# Altium PCB TAG_V2.PcbDoc (part 2 of 2)
Units mm, origin at the board's own origin, x right, y up, seen from the top; angles counter-clockwise.
Board outline 19.13 x 23 mm, 6 copper layers (L1, L2, L3, L4, L5, L6), stack 0.922 mm thick; 120 components, 81 nets, 435 pads, 552 vias.
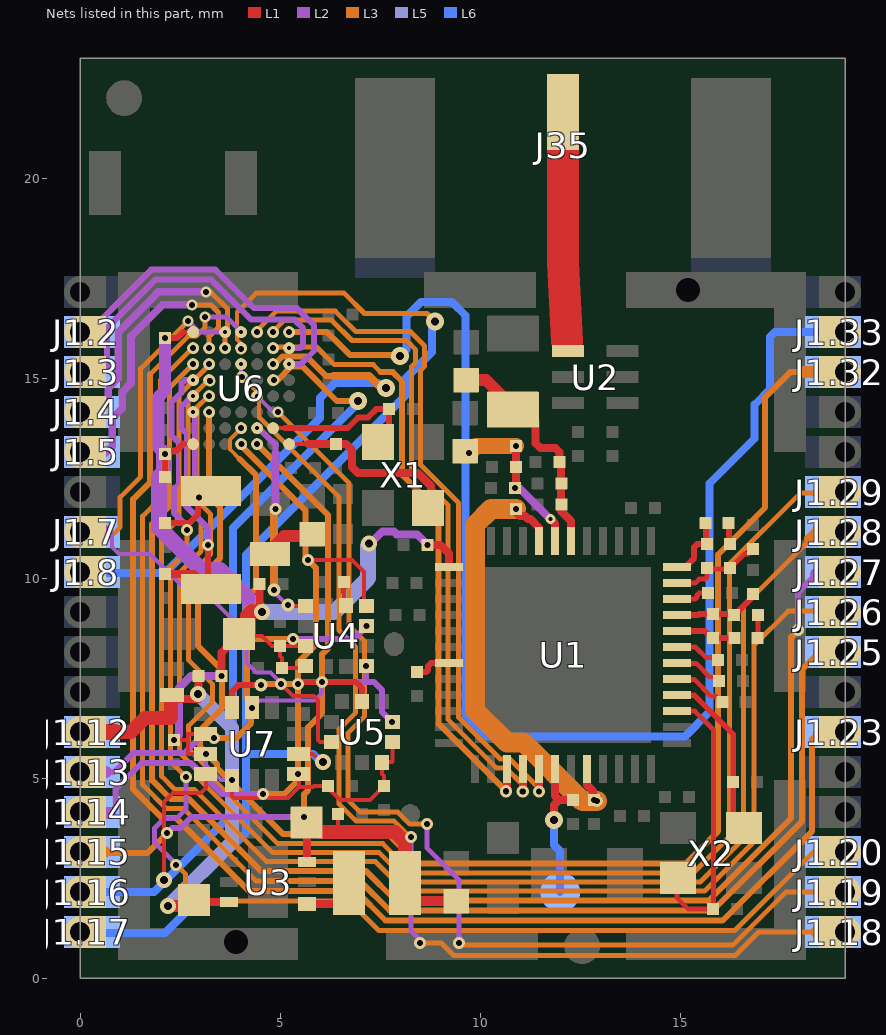
[diagram p6: the nets of this part, all layers, seen from the top]

## Via types
v1: diameter 0.3, hole 0.15, L1 to L2, tented top, 223 vias
v2: diameter 0.45, hole 0.2, L1 to L6, tented both sides, 106 vias
v3: diameter 0.3, hole 0.15, L2 to L3, 65 vias
v4: diameter 0.3, hole 0.15, L4 to L6, tented bottom, 51 vias
v5: diameter 0.23, hole 0.1, L1 to L2, tented top, 40 vias
v6: diameter 0.275, hole 0.15, L2 to L3, 29 vias
v7: diameter 0.3, hole 0.15, L1 to L2, 11 vias
v8: diameter 0.4, hole 0.2, L1 to L6, tented both sides, 9 vias
v9: diameter 0.3, hole 0.15, L1 to L3, tented top, 4 vias
v10: diameter 0.3, hole 0.1, L1 to L2, 3 vias
v11: diameter 0.52, hole 0.27, L1 to L6, tented bottom, 3 vias
v12: diameter 0.25, hole 0.1, L1 to L2, tented top, 2 vias
v13: diameter 0.32, hole 0.15, L1 to L2, tented both sides, 1 vias
v14: diameter 0.32, hole 0.15, L1 to L2, tented top, 1 vias
v15: diameter 0.3, hole 0.15, L2 to L3, tented both sides, 1 vias
v16: diameter 0.4, hole 0.2, L1 to L6, tented top, 1 vias
v17: diameter 0.32, hole 0.15, L2 to L3, tented both sides, 1 vias
v18: diameter 0.3, hole 0.15, L2 to L3, tented top, 1 vias

## Nets (pads, with @x,y where several pads share a name; then routed paths per layer and width w, separated by ;. In a path a pad name is that pad's centre, name@x,y a point inside that pad or via, vN(x,y) a via of type N, cw(c..) or ccw(c..) an arc to the next point about the centre after c; other vN are vias at no path point) (continued)
I2C_SCL: J1.15.0 U4.1 U5.2 U6.A3 U7.13 | length 21.4
  L2 w0.1: v1(4.3,6.75) 4.488,6.938 5.863,6.938 6.05,7.125 v18(6.05,7.4)
  L2 w0.15: v3(2.175,3.625) 2.3,3.75 2.505,3.75 2.78,4.025 v3(5.6,4.025) ; v18(6.05,7.4) 7.15,7.4 ; v1(7.15,7.8) 7.15,7.4 ; v1(7.8,6.4) 7.55,6.65 7.55,7.2 7.35,7.4 7.15,7.4
  L2 w0.3: J1.15.0@-0.025,3.1 J1.15.0@0.025,3.15
  L3 w0.15: 0.65,3.125 1.675,3.125 v3(2.175,3.625) ; v6(4.424,13.35) 6.2,11.574 6.2,8.25 6.05,8.1 v18(6.05,7.4) 6.05,6.625 5.7,6.275 5.7,4.7 5.6,4.6 v3(5.6,4.025)
  L3 w0.3: J1.15.0@-0.05,3.075 J1.15.0@0,3.075 ; J1.15.0@0,3.15 0.625,3.15
  other v5: 4.425,13.35
I2C_SDA: J1.14.0 U4.4 U5.4 U6.A4 U7.14 | length 22.7
  L1 w0.1: v1(5.7,10.45) 6.8,10.45 7.1,10.15 U4.4@7.1,9.3
  L1 w0.15: U7.14@3.8,6.763 3.8,7.175 3.95,7.325 v14(4.525,7.325) ; v3(5.45,7.35) 5.45,7.4 6.9,7.4 7.05,7.25 U5.4@7.05,6.913
  L2 w0.15: 0.75,4.125 0.88,4.255 0.88,4.72 1.535,5.375 2.775,5.375 3.5,4.65 ; 3.45,4.7 3.5,4.65 ; v3(4.575,4.6) 3.55,4.6 3.5,4.65
  L2 w0.3: J1.14.0@0.025,4.15 0.05,4.125 0.75,4.125
  L3 w0.15: v6(4.039,13.352) 4.039,13.292 5.632,11.7 5.632,10.518 v1(5.7,10.45) 5.9,10.25 5.9,8.35 5.45,7.9 v3(5.45,7.35) ; v3@4.525,7.275 4.6,7.35 v3(5.45,7.35) ; v3(4.575,4.6) 5.1,4.6 5.45,4.95 v3(5.45,7.35)
  other v1: 5.45,7.35
  other v3: 4.525,7.325 5.7,10.45
  other v5: 4.025,13.35
IRQ1: J1.16.0 U6.E2 U7.4 | length 22.2
  L1 w0.1: v8(2.1,2.45) 2.1,4.4 2.325,4.625 3.025,4.625 3.15,4.75 U7.4@3.15,5.025 ; U7.4@3.15,5.1 U7.4@3.15,5.025 ; U7.4@3.175,5.05 U7.4@3.15,5.025
  L3 w0.15: v5(4.825,14.95) v6(4.85,14.951) ; v5(4.825,14.95) v6(4.85,14.951) 4.939,14.951 5.281,15.293 5.554,15.293 6.421,14.426 v2(6.95,14.426)
  L6 w0.2: J1.16.0@0,2.15 J1.16.0@0.3,2.15 1.85,2.15 3.825,4.125 3.825,11.251 v2@6.851,14.277
IRQ2: J1.17.0 U6.G4 U7.9 | length 29.3
  L1 w0.1: U7.9@5.475,5.6 5.821,5.6 v8@6.038,5.384
  L3 w0.1: 3.95,16.675 3.925,16.65 3.925,15.961 4.024,15.861 v6(4.024,15.725)
  L3 w0.125: 3.95,16.675 4.4,17.125 6.6,17.125 7.112,16.613 8.67,16.613 v2(8.867,16.417)
  L3 w0.3: J1.17.0@0,1.15 J1.17.0@0.025,1.125
  L6 w0.2: J1.17.0@0,1.125 2.125,1.125 2.85,1.85 2.85,2.35 3.1,2.6 ; 3.112,2.587 4.15,3.625 4.15,10.575 8.125,14.55 8.125,14.975 8.8,15.65 8.8,16.351 v2(8.867,16.417) ; 4.15,5.6 5.821,5.6 v8@6.038,5.384
  other v5: 4.025,15.75
  other v8: 6.075,5.4
IRQ_DRDY: J1.7.0 U5.7 U6.H5 | length 17.6
  L1 w0.1: v1@5.05,7.35 5.05,7.326 5.263,7.113 5.326,7.05 5.85,7.05 5.95,6.95 5.95,5.95 6,5.9 U5.7@6.288,5.9
  L2 w0.1: 0.75,11.1 0.8,11.05 0.8,10.776 0.976,10.6 1.75,10.6 2.9,9.45 3.325,9.45 4.162,8.612 4.162,7.888 4.415,7.635 4.765,7.635 v1@5.05,7.35
  L2 w0.125: v6@2.7,16.425 2.975,16.15 v5(3.625,16.15)
  L2 w0.2: 0.5,11.15 0.65,11.15 0.7,11.1 0.75,11.1
  L2 w0.5: J1.7.0@0,11.2 0.05,11.15 0.5,11.15
  L3 w0.125: 0.65,11.125 0.85,11.125 1,11.275 1,12.025 1.512,12.537 1.512,15.238 v6(2.7,16.426)
  L3 w0.3: J1.7.0@0,11.125 0.65,11.125
  other v1: 5.025,7.35
IRQ_MAG: U4.7 U6.B3 | length 5.2
  L1 w0.1: v13@5.2,9.3 U4.7@5.6,9.3
  L2 w0.1: v17(4.85,9.7) 4.85,9.65 5.184,9.316 5.191,9.316 v13(5.2,9.325)
  L2 w0.15: v5(4.425,13.75) 4.466,13.75 4.881,13.334 4.881,13.125
  L2 w0.2: v3(4.881,11.725) 4.881,13.125
  L3 w0.2: v17(4.85,9.7) v3@4.85,11.75
MAG_CS: J1.13.0 U4.3 U6.B4 | length 15.8
  L2 w0.15: 0.65,5.15 0.85,5.15 1.1,5.4 1.325,5.625 2.6,5.625 2.975,6 v3(3.35,6) ; v3(5.325,8.475) 6.837,8.475 v7(7.163,8.8) ; v7@7.169,8.794 v7@7.175,8.8
  L2 w0.3: J1.13.0@0,5.15 0.65,5.15
  L3 w0.1: 3.984,12.984 3.746,13.222 3.745,13.464 4.025,13.744 v5(4.025,13.75)
  L3 w0.15: v3(3.35,6) 3.9,6 4.275,6.375 4.275,6.885 4.175,6.985 4.175,8.45 4.2,8.475 v3(5.325,8.475) ; 3.984,12.984 4.4,12.568 4.4,9.75 4.175,9.525 4.175,8.5
  other v6: 4.024,13.75
NetC3_2: C3.2 U6.D7 X3.2 | length 6.8
  L1 w0.15: X3.2@3.15,9.8 3.2,9.85 v1(3.2,10.825) ; X3.2@3.425,10.025 3.825,10.025 3.82,10.02 X3.2@3.82,9.92
  L1 w0.2: C3.2@2.125,10.1 2.85,10.1 X3.2@3.15,9.8
  L2 w0.1: 2.637,13.663 2.65,13.65 2.65,11.95
  L2 w0.15: 2.625,11.95 2.625,11.825 3.2,11.25 v1(3.2,10.825) ; 2.625,13.65 2.535,13.74 2.535,14.291 v5@2.794,14.55
  other v5: 2.825,14.55
NetC6_2: C6.2 U6.C7 X3.1 | length 3.8
  L1 w0.15: C6.2@2.125,11.375 2.725,11.375 2.95,11.6 2.95,11.9 X3.1@3.225,12.175
  L2 w0.15: v5(2.825,14.15) 2.875,14.1 2.875,12.3 2.875,12.115 v1(2.97,12.02)
NetC7_1: C7.1 U1.7 | length 1.1
  L1 w0.125: U1.7@14.925,8.275 15.385,8.275 15.65,8.01 C7.1@15.875,8.01
NetC8_1: C8.1 U1.6 | length 1.2
  L1 w0.125: U1.6@14.94,7.87 15.4,7.87 15.745,7.525 15.875,7.525 C8.1@15.975,7.425
NetC9_1: C9.1 U1.31 | length 1
  L1 w0.15: C9.1@8.425,7.65 8.65,7.65 8.7,7.7 8.7,7.8 8.775,7.875 U1.31@9.225,7.875
NetC10_1: C10.1 U1.10 | length 0.9
  L1 w0.12: U1.10@14.925,9.475 15.075,9.475 15.375,9.475 15.425,9.525 15.425,9.575 15.475,9.625 C10.1@15.7,9.625
NetC11_1: C11.1 C12.1 C15.2 U1.9 | length 2.2
  L1 w0.15: U1.9@14.925,9.075 15.45,9.075 15.475,9.1 C12.1@15.825,9.1 16.3,9.1 16.325,9.1 C11.1@16.35,9.075 16.825,9.55 C15.2@16.825,9.6
NetC11_2: C11.2 R2.1 | length 0.5
  L1 w0.125: R2.1@16.935,8.5 16.95,8.515 C11.2@16.95,9
NetC12_2: C12.2 R2.2 U1.8 | length 1.6
  L1 w0.15: U1.8@14.925,8.675 15.625,8.675 C12.2@15.85,8.45 ; C12.2@15.85,8.5 R2.2@16.315,8.5 ; R2.2@16.315,8.45 R2.2@16.365,8.5
NetC13_1: C13.1 R3.2 | length 0.5
  L1 w0.15: R3.2@16.21,11.375 16.225,11.36 C13.1@16.225,10.85
NetC13_2: C13.2 C16.2 C19.2 U1.11 | length 2.4
  L1 w0.125: U1.11@14.925,9.875 15.375,9.875 15.475,9.975 15.625,9.975 15.675,10.025 C19.2@15.675,10.225 ; C19.2@15.675,10.25 C19.2@15.675,10.225 ; C16.2@16.825,10.725 16.7,10.6 16.6,10.6 C13.2@16.25,10.25 16.225,10.225 C19.2@15.675,10.225
NetC19_1: C19.1 R3.1 U1.12 | length 1.6
  L1 w0.15: U1.12@14.925,10.275 15.125,10.275 15.35,10.5 15.35,10.775 15.425,10.85 C19.1@15.65,10.85 ; R3.1@15.65,11.35 C19.1@15.65,10.85 ; C19.1@15.675,10.85 C19.1@15.65,10.85
NetC22_2: C22.2 U1.3 X2.1 | length 6.9
  L1 w0.125: X2.1@14.925,2.475 14.925,2 15.2,1.725 C22.2@15.825,1.725 15.837,1.737 C22.2@15.837,1.775 ; U1.3@15.1,6.675 15.367,6.675 15.837,6.204 C22.2@15.837,1.775 ; C22.2@15.825,1.775 C22.2@15.837,1.775
NetC26_2: C26.2 C27.2 C28.2 C29.2 L2.2 U1.18 | length 5.2
  L1 w0.2: C26.2@11.39,13.91 11.39,13.37 11.51,13.25 11.88,13.25 11.98,13.15 C27.2@11.98,12.9 ; C27.2@12.025,12.9 12.025,12.375 12.025,11.675 12.275,11.425 U1.18@12.275,10.925
  L1 w0.3: L2.2@9.65,14.95 10.15,14.95 C26.2@10.875,14.225 ; C26.2@10.835,14.075 C26.2@10.835,14.225
NetC30_2: C30.2 C31.2 C32.2 L3.1 U1.19 | length 4.1
  L1 w0.2: v1(10.875,12.25) 10.9,12.275 C31.2@10.9,12.775 v3(10.9,13.3) ; v12(11.765,11.475) 11.875,11.365 U1.19@11.875,10.925
  L2 w0.2: v1(10.875,12.25) 10.98,12.25 11.755,11.475 v12(11.765,11.475)
  L3 w0.3: 9.875,13.275 9.9,13.3
  L3 w0.4: v1(9.725,13.125) 9.875,13.275 ; 9.9,13.3 v3(10.9,13.3)
  other v1: 10.9,13.3
  other v3: 9.725,13.125
NetC34_2: C34.2 C58.2 L4.2 L5.1 U3.3 | length 5.8
  L1 w0.1: 6.45,3.7 C58.2@6.45,4.15
  L1 w0.2: C34.2@5.65,3.7 5.675,3.675 U3.3@5.675,2.9
  L1 w0.25: L4.2@8.2,2.025 8.3,1.925 L5.1@9.4,1.925
  L1 w0.35: C34.2@6,3.65 7.875,3.65 8.125,3.4 L4.2@8.125,2.375
NetC38_2: C38.2 U1.4 X2.3 | length 4.3
  L1 w0.14: U1.4@14.925,7.075 15.35,7.075 16.325,6.1 16.325,5.4 ; X2.3@16.325,3.935 C38.2@16.325,4.9 16.325,5.5
  L1 w0.3: X2.3@16.325,3.935 X2.3@16.52,3.74
NetC57_2: C57.2 U4.5 | length 0.6
  L1 w0.1: U4.5@6.6,9.3 C57.2@6.6,9.875
NetL4_1: L4.1 U3.1 | length 0.8
  L1 w0.2: U3.1@5.675,1.85 L4.1@6.5,1.85
NetL7_1: L7.1 L8.2 | length 1.2
  L1 w0.3: L8.2@4.7,10.65 5.1,11.05 L7.1@5.7,11.05
NetR1_1: R1.1 U1.5 | length 1.3
  L1 w0.125: U1.5@14.93,7.47 15.35,7.47 15.77,7.05 15.9,7.05 15.975,6.975 R1.1@16,6.975
NFC1: J1.5.0 U6.G6 | length 7.3
  L2 w0.19: J1.5.0@0,13.15 0.025,13.125 0.625,13.125 0.8,13.3 0.8,14 1.05,14.25 1.05,14.65 1.271,14.871 1.271,16.054 1.291,16.054 2.067,16.83 v6@2.72,16.83
  L3 w0.125: v6@2.825,16.825 3,16.825 3.274,16.826 3.462,16.638 3.462,16.275 3.224,16.037 v6(3.224,15.75) ; v6@2.825,16.85 v6@2.833,16.842
  other v5: 3.225,15.75
  other v6: 2.799,16.825
NFC2: J1.4.0 U6.G5 | length 6.8
  L2 w0.19: J1.4.0@0.025,14.15 0.425,14.15 0.7,14.425 0.7,14.75 0.953,15.003 0.953,16.147 1.763,16.956 1.763,16.963 1.957,17.157 v6@3.068,17.157
  L3 w0.125: v6@3.175,17.15 3.268,17.15 3.687,16.731 3.687,16.15 3.624,16.087 v6(3.624,15.75)
  other v5: 3.625,15.75
  other v6: 3.15,17.151
P0.02: J1.32.0 U6.C6 | length 37.4
  L3 w0.15: v6(3.224,14.15) 3.224,12.051 3.5,11.775 3.5,10.499 2.95,9.949 2.95,8.3 3.55,7.701 3.55,6.75 3,6.2 3,5.771 3.425,5.346 3.425,5.25 5.075,3.6 7.703,3.6 8.438,2.865 15.14,2.865 15.95,3.675 15.95,10.59 17.125,11.765 17.125,14.525 17.75,15.15 18.125,15.15
  L3 w0.3: 18.125,15.15 J1.32.0@19.125,15.15 J1.32.0@19.15,15.15
  other v5: 3.225,14.15
P0.03: J1.29.0 U6.D6 | length 35.5
  L3 w0.125: v5(3.225,14.55) 3.2,14.55 2.924,14.274 2.924,14.025 2.925,14.024 2.925,11.937 3.263,11.6 3.263,10.597 2.713,10.047 2.713,7.95 3.312,7.35 3.313,6.913 2.713,6.313 2.713,5.722 3.188,5.248 3.188,5.112 4.937,3.363 7.569,3.363 8.304,2.627 15.327,2.627 16.228,3.528 16.228,10.353 18,12.125 18.4,12.125
  L3 w0.3: 18.475,12.125 19.05,12.125 J1.29.0@19.1,12.175
  other v6: 3.224,14.55
P0.04: J1.28.0 U6.E6 | length 35.1
  L3 w0.125: v6(3.248,14.925) 3.224,14.925 3.2,14.95 2.699,14.449 2.699,13.025 2.7,11.725 3.025,11.4 3.025,10.678 2.488,10.14 2.488,5.629 2.963,5.154 2.963,4.987 4.812,3.137 7.476,3.137 8.211,2.402 15.5,2.402 16.588,3.49 16.588,6.076 16.59,6.079 16.59,8.912 16.578,8.925 ; 16.588,8.925 16.588,9.312 18.25,10.975
  L3 w0.3: 18.25,10.975 18.425,11.15 J1.28.0@19.125,11.15 J1.28.0@19.175,11.15
  other v5: 3.225,14.95
P0.05: J1.20.0 U6.E7 | length 32.1
  L2 w0.1: 2.35,12.25 2.45,12.35 2.45,13.425 2.437,13.437
  L2 w0.125: v3(2.4,2.825) 2.4,2.85 1.863,3.387 1.863,3.755 2.095,3.988 2.407,3.988 2.65,4.231 v15(2.65,5.025)
  L2 w0.15: 2.35,12.25 2.35,11.625 2.675,11.3 v3(2.675,11.2) ; 2.425,13.425 2.285,13.565 2.285,14.395 2.535,14.645 2.535,14.86 2.625,14.95 v5(2.825,14.95)
  L3 w0.125: v3(2.4,2.825) 2.413,2.825 2.637,2.6 2.637,2.363 3.07,1.93 6.73,1.93 7.472,1.188 16.358,1.188 16.55,1.38 ; v15(2.65,5.025) 2.263,5.412 2.263,10.275 2.675,10.687 v3(2.675,11.2) ; 16.552,1.378 18.3,3.125 18.45,3.125
  L3 w0.3: 18.45,3.125 J1.20.0@19.125,3.125
P0.06: J1.27.0 U6.F7 | length 36
  L2 w0.15: v3(17.95,8.7) 17.95,9.65 18.4,10.1
  L2 w0.3: 18.4,10.1 19.075,10.1 J1.27.0@19.1,10.125
  L3 w0.125: 1.8,11.35 2.236,11.786 2.236,14.762 v6(2.824,15.35)
  L3 w0.15: 1.8,11.35 1.8,4.947 2.272,4.475 2.725,4.475 3.279,3.921 4.525,2.675 7.15,2.675 7.885,1.94 15.711,1.94 17.775,4.004 17.775,8.525 v3(17.95,8.7)
  other v5: 2.825,15.35
P0.07: J1.26.0 U6.F6 | length 34.8
  L3 w0.125: v6@3.224,15.325 2.948,15.05 2.474,14.575 2.474,11.486 2.038,11.05 2.038,5.045 2.37,4.712 2.863,4.712 4.663,2.912 7.383,2.912 8.118,2.177 15.613,2.177 16.852,3.417 16.852,8.327 17.7,9.175 18.375,9.175
  L3 w0.15: 18.375,9.175 18.475,9.175
  L3 w0.3: 18.475,9.175 19.1,9.175 J1.26.0@19.125,9.15
  other v5: 3.225,15.35
  other v6: 3.224,15.35
P0.08: J1.25.0 U6.G7 | length 35.2
  L3 w0.125: v6(2.824,15.75) 2.8,15.75 2.05,15 2.05,14.986 2.011,14.947 2.011,11.999 1.563,11.55 1.563,4.834 2.159,4.237 2.588,4.237 4.4,2.425 4.65,2.425
  L3 w0.15: 4.65,2.425 7.004,2.425 7.739,1.69 15.815,1.69 18.05,3.925 18.05,7.725 18.475,8.15
  L3 w0.3: 18.475,8.15 J1.25.0@19.1,8.15
  other v5: 2.825,15.75
P0.11: J1.18.0 U6.F4 | length 28.2
  L2 w0.1: v5(4.025,15.35) 4.025,15.051 v3(4.05,15.026)
  L2 w0.125: v3(8.275,3.525) 8.275,1.175 8.5,0.95 v3(8.5,0.875)
  L3 w0.1: v3(4.05,15.026) 4.05,15.018 4.472,14.597 4.472,14
  L3 w0.125: 4.5,14 6.475,12.025 6.475,8.692 6.888,8.279 6.888,6.638 6.475,6.225 6.475,4.35 6.9,3.925 7.85,3.925 v3@8.275,3.5 ; v3(8.5,0.875) 9.033,0.875 9.346,0.562 16.374,0.562 16.961,1.15 18.4,1.15
  L3 w0.3: 18.4,1.15 J1.18.0@19.125,1.15
P0.15: J1.23.0 U6.H4 | length 36.1
  L2 w0.125: v6@3.1,16.525 3.664,16.525 4.025,16.164 v5(4.025,16.15)
  L3 w0.125: 1.75,15.1 2.7,16.05 2.9,16.05 3.125,16.275 v6(3.125,16.526)
  L3 w0.15: 1.325,4.725 2.05,4 2.4,4 4.225,2.175 6.9,2.175 7.635,1.44 16.065,1.44 18.3,3.675 18.3,5.975 18.425,6.1 ; 1.327,4.727 1.325,4.728 1.325,11.014 1.325,11.975 1.75,12.4 1.75,15.1
  L3 w0.3: 18.475,6.1 J1.23.0@19.1,6.1
P0.21: J1.33.0 U6.H1 | length 34.4
  L3 w0.15: v6(5.225,16.15) 6.175,16.15 6.75,15.575 7.776,15.575 7.825,15.526 7.975,15.526 v2(8,15.551)
  L6 w0.2: v2(8,15.551) 8.163,15.713 8.163,16.538 8.525,16.9 9.3,16.9 9.64,16.56 9.64,6.49 10.09,6.04 15.12,6.04 15.73,6.65 15.73,12.36 16.865,13.495 16.865,14.335 17.25,14.72 17.25,16.03 17.37,16.15 J1.33.0@18.825,16.15 J1.33.0@19.125,16.15
  other v5: 5.225,16.15
P0.22: J1.8.0 U6.F2 | length 12.9
  L3 w0.15: v6(4.826,15.349) 4.865,15.349 5.059,15.543 5.657,15.543 6.15,15.05 6.33,15.05
  L3 w0.2: 6.33,15.05 7.227,15.05 v2@7.451,14.826
  L6 w0.2: J1.8.0@0.05,10.125 2.125,10.125 6,14 6,14.5 6.375,14.875 7.45,14.875 7.475,14.85 7.563,14.85 7.65,14.762 v2(7.65,14.751)
  other v5: 4.825,15.35
P0.26: J1.19.0 U6.D3 | length 27.1
  L2 w0.1: v5(4.425,14.55) 4.825,14.15 v6(4.95,14.15)
  L2 w0.125: v3(8.675,3.85) 8.675,3.25 8.875,3.05 9.475,2.45 v3(9.475,0.875)
  L3 w0.125: v6(4.95,14.15) 6.725,12.375 6.725,8.813 7.113,8.425 7.113,6.544 6.7,6.132 6.7,4.45 7,4.15 7.943,4.15 8.243,3.85 v3(8.675,3.85) ; v3(9.475,0.875) 9.528,0.822 16.315,0.822 17.643,2.15 18.475,2.15
  L3 w0.3: 18.475,2.15 J1.19.0@18.975,2.15
SPI1_CLK: U1.41 U6.H3 | length 17.9
  L1 w0.2: v1@11.475,4.685 U1.41@11.475,5.225
  L3 w0.125: v6@4.35,16.15 v6@4.4,16.15 ; v5(4.425,16.15) 4.425,16.199 4.901,16.675 6.379,16.675 6.891,16.163 8.254,16.163 8.613,15.804 8.613,15.297 8.513,15.197 8.513,12.83 9.46,11.883 9.46,6.519 10.497,5.482 10.736,5.482 11.47,4.748 v1(11.47,4.67)
  other v3: 11.47,4.67
  other v6: 4.425,16.15
SPI1_MISO: U1.40 U6.H2 | length 17
  L1 w0.2: v1@11.07,4.68 11.075,4.685 U1.40@11.075,5.225
  L2 w0.2: v3(11.06,4.66) v3@11.1,4.7
  L3 w0.125: v6(4.825,16.15) 4.825,16.174 5.101,16.45 6.286,16.45 6.798,15.938 8.161,15.938 8.388,15.711 8.388,15.39 8.288,15.29 8.288,12.737 9.2,11.825 9.2,6.461 10.404,5.257 10.643,5.257 11.06,4.84 v3(11.06,4.66) ; v3@11.05,4.625 v3@11.05,4.66
  other v1: 11.07,4.66
  other v5: 4.825,16.15
SPI1_MOSI: U1.39 U6.G2 | length 15.4
  L1 w0.2: v1@10.675,4.725 U1.39@10.675,5.225
  L3 w0.125: v6(4.824,15.75) 4.855,15.78 5.907,15.78 6.35,15.338 7.329,15.338 7.516,15.151
  L3 w0.15: 7.516,15.151 7.816,15.151 8.05,14.916 8.05,12.58 8.963,11.667 8.963,6.362 v3(10.65,4.675)
  other v1: 10.65,4.67
  other v5: 4.825,15.75
SWDCLK: J1.2.0 U6.F1 | length 8.5
  L2 w0.15: J1.2.0@-0.025,16.15 J1.2.0@0,16.15 0.215,16.15 1.778,17.713 3.383,17.713 4.347,16.75 5.42,16.75 5.847,16.324 5.847,15.678 5.519,15.35 v5(5.225,15.35)
SWDIO: J1.3.0 U6.G1 | length 8.4
  L2 w0.15: J1.3.0@0,15.15 0.525,15.15 0.675,15.3 0.675,16.25 0.85,16.425 0.85,16.432 1.882,17.463 3.28,17.463 4.28,16.462 5.354,16.462 5.575,16.242 5.575,15.825 5.5,15.75 v5(5.225,15.75)
UWB_ANT: J35.1 U2.1 | length 6.2
  L1 w0.8: J35.1@12.075,22.1 12.075,17.875 12.175,15.926
VCC: C37.2 D2.K J1.12.0 R10.1 U3.6 | length 11.7
  L1 w0.1: 2.275,6.9 D2.K@2.35,6.975
  L1 w0.2: D2.K@2.35,6.975 2.965,6.975 R10.1@2.965,7.55 ; C37.2@2.85,1.9 U3.6@3.725,1.9
  L1 w0.3: v8(2.2,1.8) 2.8,1.8 C37.2@2.85,1.85
  L1 w0.35: 0.875,6.15 1.25,6.15 ; 1.275,6.15 1.625,6.5 2.275,6.5 2.275,6.9
  L1 w0.4: J1.12.0@0.3,6.15 0.875,6.15
  L5 w0.35: v8(2.2,1.8) 3.8,3.4 3.8,6.25 v8(2.95,7.1)
VCC_DEV: C14.2 C33.2 C36.2 C39.2 C41.2 C43.2 C45.2 C46.2 C54.2 C55.2 R10.2 R11.2 U1.25 U4.9 U4.10 U5.1 U5.10 U6.A7 U6.H7 U7.2 U7.3 U7.5 U7.8 | length 33.6
  L1 w0.1: v7(2.35,5.95) 2.7,5.95 ; 2.575,13.35 U6.A7@2.825,13.35 ; 2.575,16.15 U6.H7@2.825,16.15 ; v1(3.15,5.6) 2.7,5.6 2.7,6.1 U7.2@3.15,6.1 ; U7.5@3.8,4.9 3.8,4.55 3.85,4.5 5.2,4.5 5.475,4.775 ; C36.2@4.2,8.55 4.549,8.55 4.799,8.3 C41.2@5,8.3 ; C43.2@5.026,7.75 C43.2@5.05,7.75 ; C41.2@5.05,8.25 C41.2@5,8.3 ; U7.8@5.475,5.1 5.475,4.775 ; U4.9@5.6,8.3 C41.2@5,8.3 ; U4.10@5.65,7.85 5.55,7.75 C43.2@5.05,7.75 ; U5.10@7.55,5.35 7.55,5.1 7.6,5.05 C33.2@7.6,4.8 7.25,4.45 6.5,4.45 6.2,4.75 C39.2@6.2,4.8 5.85,4.8 5.825,4.775 5.475,4.775 ; U5.10@7.55,5.4 7.8,5.4 7.813,5.413 U5.1@7.813,5.9 ; C41.2@5,8.3 5,8.05 5.05,8 C43.2@5.05,7.75
  L1 w0.15: v1(2.125,16) 2.425,16 2.575,16.15
  L1 w0.18: C46.2@2.125,12.525 v1(2.125,13.1) ; C55.2@2.205,13.175 2.4,13.175 2.575,13.35
  L1 w0.2: v7(3.535,7.55) 3.535,8.135 C36.2@3.7,8.3 ; v8@4.415,9.185 v8@4.5,9.1 ; v8@4.49,9.185 R11.2@4.49,9.85 ; v8@7.215,10.86 v8(7.222,10.86) ; v1(8.69,10.83) 9.005,10.83 9.225,10.61 U1.25@9.225,10.275
  L1 w0.4: C36.2@4.2,8.55 4.2,9.05 4.3,9.15
  L2 w0.1: v1(3.15,5.6) 3.15,5.318 3.518,4.95 v1(3.8,4.95)
  L2 w0.2: v7(2.35,5.95) 2.475,6.075 2.475,7.25 2.775,7.55 v7(3.535,7.55) ; v8(7.222,10.86) 7.25,10.86 7.555,11.165 7.845,11.165 7.915,11.095 8.425,11.095 v1(8.69,10.83)
  L2 w0.3: v1(2.125,13.1) 2.1,13.125 1.96,13.265 1.96,14.53 2.125,14.694 v1(2.125,16)
  L2 w0.4: v1@2.1,13.125 2.1,12.655 1.975,12.53 1.975,11.264 3.039,10.2 3.5,10.2 v8(4.55,9.15)
  L5 w0.4: v8(4.55,9.15) 6.35,9.15 7.2,10 v8@7.2,10.8
  other v1: 5.45,5.1
VDDDIG: C1.2 C24.2 U1.20 U1.44 | length 12
  L1 w0.2: v3(10.9,11.725) 10.9,11.65 C24.2@10.925,11.625 ; C24.2@10.925,11.775 C24.2@10.925,11.625 ; U1.20@11.475,10.94 11.475,11.258 11.258,11.475 11.2,11.475 11.125,11.55 11,11.55 C24.2@10.925,11.625 ; U1.44@12.675,5.225 12.675,4.825 12.825,4.675 C1.2@12.825,4.425
  L3 w0.5: v3(10.9,11.725) 10.267,11.725 9.872,11.33 9.872,6.69 10.666,5.896 11.084,5.896 12.555,4.425 v3(12.925,4.425)
  other v1: 12.85,4.45 10.9,11.725
VDDIO: C2.2 T1.1 U1.42 | length 3.6
  L1 w0.2: v2(11.85,3.95) 11.85,4.325 11.975,4.45 ; U1.42@11.875,5.225 11.875,4.55 11.975,4.45 ; C2.2@12.325,4.45 11.975,4.45
  L6 w0.2: v2(11.85,3.95) 11.85,3.325 12,3.175 T1.1@12,2.15
XC1: C49.2 U6.B2 X1.3 | length 3.8
  L1 w0.1: U6.B2@4.825,13.75 5.125,13.75
  L1 w0.15: 5.125,13.75 6.684,13.75 6.95,14.016 7.191,14.016 7.4,14.225 C49.2@7.725,14.225 ; X1.3@7.35,13.587 X1.3@7.456,13.481 ; X1.3@7.725,13.525 C49.2@7.725,14.113
XC2: C48.2 U6.A1 X1.1 | length 4.8
  L1 w0.1: U6.A1@5.225,13.35 5.7,13.35
  L1 w0.2: 5.7,13.35 C48.2@6.4,13.35 6.65,13.35 6.8,13.2 6.8,12.775 6.95,12.625 8.45,12.625 8.775,12.3 X1.1@8.775,11.725
pads on no net: A2.2 F1.A1 F2.A1 U1.1 U1.2 U1.13 U1.14 U1.29 U1.34 U1.Paste1 U1.Paste2 U1.Paste3 U1.Paste4 U1.Paste5 U1.Paste6 U1.Paste7 U1.Paste8 U1.Paste9 U2.6 U3.Paste1 U3.Paste2 U3.Paste3 U3.Paste4 U4.2 U4.11 U4.12 U6.C3 U7.10 U7.11

## Polygon pours and split planes (outlines as drawn)
GND on L2 "L2_GND" (solid, remove dead copper, pour order 9): 0.425,17.65 18.7,17.65 18.7,0.45 0.425,0.45
GND on L5 "L5-GND" (solid, remove dead copper, pour order 10): 0.926,0.475 18.15,0.475 18.15,17.65 0.954,17.65
GND on L6 "L6-GND" (solid, remove dead copper, pour order 12): 1.6,0.45 17.525,0.45 17.525,17.65 1.6,17.65
GND on L3 "L3-GND" (solid, remove dead copper, pour order 13): 0.9,17.65 18.2,17.65 18.2,0.45 0.9,0.45
GND on L4 "L4-GND" (solid, remove dead copper, pour order 11): 0.65,17.65 18.475,17.65 18.475,0.725 18.475,0.45 0.65,0.45
GND on L1 "PWR/SIG1-No Net 1" (solid, pour order 8): 18.5,22.6 18.5,17.6 6.3,17.6 6.3,22.6
GND on L1 "L1_GND" (hatched 90Degree grid 0.1 track 0.1, remove dead copper, pour order 14): 0.891,17.603 18.215,17.603 18.215,0.508 0.944,0.508

## Other copper
L1:
  rectangle net GND: 18.4,17.4 18.5,18
  rectangle net GND: 13.3,17.4 18.4,18.15
  rectangle net GND: 6.3,17.425 11.35,18.075
  rectangle net NetC34_2: 8.525,1.575 9.725,2.225
  rectangle net NetC34_2: 6.05,3.775 6.6,4.275
  rectangle net GND: 13.15,21.4 18.4,22.6
  rectangle net GND: 6.3,21.3 11.4,22.5
  rectangle net GND: 6.28,16.93 7.31,17.65
  rectangle net GND: 17.025,5.25 17.9,6.725
  rectangle net GND: 7.075,17.425 8.075,17.65
  rectangle net GND: 1.575,14.75 1.85,16.75
  rectangle net GND: 0.95,11.25 1.75,13.15
  rectangle net GND: 5.45,0.425 7.675,1.25
  rectangle net GND: 17.35,4.95 18.15,6.8
  rectangle net GND: 13.225,16.975 14,17.65
  rectangle net GND: 11.05,16.75 11.38,17.65
  rectangle net GND: 17.025,6.725 17.75,7.95
  rectangle net GND: 0.95,10.95 1.75,11.25
  rectangle net GND: 7.075,16.75 8.55,17.425
  rectangle net GND: 8.075,16.75 8.75,17.65
  rectangle net GND: 14.4,16.475 16,17.3
  region net GND: 4.55,3.25 4.55,3.85 3.175,3.85 3.175,3.25
  rectangle net GND: 0.925,6.9 1.75,7.3
  rectangle net GND: 11.125,17.55 11.4,18.05
  pour cut-out: 14.5,11.5 cw(c14.5,11.52) 14.48,11.52 14.48,11.95 14.63,11.95 14.63,11.5
  region net VCC: 3.95,1.55 3.95,2.175 3.419,2.175 3.225,2.35 3.025,2.35 3.025,1.55
  region net NetL4_1: 5.45,1.575 5.45,2.175 6.004,2.175 6.325,2.725 7.125,2.725 7.125,1.575
  region net GND: 3.25,3.05 3.325,3.125 4.05,3.125 4.05,2.675 3.5,2.675 3.5,2.275 5.9,2.275 5.9,2.65 4.9,2.65 4.5,3.05 4.5,3.425 2.95,3.425 2.975,3.4 2.975,3.05
  region net NetC34_2: 5.45,3.025 5.275,3.5 5.275,3.8 6.6,3.825 7.925,3.825 8.525,3.425 8.525,3.175 7.725,3.175 7.6,3.3 7.6,3.325 6.2,3.325 5.9,3.025
  pour cut-out: 4.2,1.5 5.2,1.5 5.2,1.25 4.2,1.25
  region net BALUN_RF_P: 13.155,14.305 13.155,13.505 13.955,13.505 13.955,14.305
  region net BALUN_RF_N: 11.795,14.305 11.795,13.505 12.595,13.505 12.595,14.305
  pour cut-out: 12.68,14.885 12.68,14.5 13.11,14.5 13.11,14.885
  pour cut-out: 14.202,14.765 14.207,13.184 13.486,13.189 13.634,14.765
  pour cut-out: 13.537,13.565 13.537,13.845 13.623,13.845 13.633,13.581
  pour cut-out: 12.105,15.035 11.547,15.025 11.52,15.75 11.775,15.75 11.74,15.55 11.84,15.53
  pour cut-out: 12.39,3.61 12.39,3.15 12.42,3.12 12.43,3.13 13.575,3.13 13.575,3.55 13.5,3.625
  pour cut-out: 11.13,3.85 11.13,3.29 11.15,3.27 11.17,3.29 12.22,3.29 12.22,3.85 12.16,3.91 12.1,3.85
  pour cut-out: 12.37,1.45 13.74,1.45 13.76,1.47 13.72,1.51 13.72,2.94 13.56,2.94 13.26,3.24 12.34,3.24
  pour cut-out: 11.11,1.96 11.12,1.95 11.12,1.34 12.17,1.34 12.25,1.42 12.23,1.44 12.23,1.95
  pour cut-out: 10.2,2.4 10.2,2.8 10.55,3.15 11.29,3.15 11.27,3.13 11.27,2.4
  pour cut-out: 4.35,6.525 4.35,6.75 4.4,6.8 5.1,6.8 5.1,6.525
  pour cut-out: 1.95,4.187 1.95,1.25 10.175,1.25 10.175,4.212
  pour cut-out: 16.05,6.7 16.05,5.175 16.1,5.125 16.65,5.125 16.612,5.163 16.612,6.725 16.1,6.725 16.075,6.7
  pour cut-out: 13.425,3.925 13.45,3.9 13.45,1.321 17.271,1.321 17.275,1.325 17.275,3.825 17.325,3.875 13.45,3.875 13.35,3.975
  pour cut-out: 14.5,11.5 14.5,10.5 15.3,10.5 15.6,11 15.6,11.5
  pour cut-out: 5.47,16.8 7.05,16.8 7.05,17.7 5.47,17.7
  pour cut-out: 2.701,15.962 2.701,5.987 10.965,5.987 10.901,15.962
  pour cut-out: 5.275,11.675 5.275,11.25 5.45,11.25 5.425,11.275 5.425,11.7
  pour cut-out: 14.1,3.875 14.1,3.35 14.35,3.35 14.35,3.875
  pour cut-out: 1.918,11.925 2.332,11.925 2.332,12.825 1.932,12.825
  pour cut-out: 6.174,11.875 6.8,11.875 6.8,12.775 6.188,12.775
  pour cut-out: 16.65,2.075 16.65,1.45 17.1,1.45 17.1,2.075
  pour cut-out: 16.3,3.5 16.3,2.875 16.75,2.875
  pour cut-out: 15.7,2.35 15.7,2.975 15.25,2.975
  pour cut-out: 8.47,2.275 8.575,2.275 8.575,0.47 8.47,0.47
  pour cut-out: 14.175,1.026 14.175,3.075 12.7,3.075
  pour cut-out: 12.55,3.025 12.55,3.65 12.1,3.65
  pour cut-out: 10.55,10.9 10.525,10.925 10.525,11.525 10.675,11.525 10.7,11.55 10.8,11.45 10.8,10.925 10.8,10.65 10.55,10.675
  pour cut-out: 10,11.75 10,12.025 10,12.725 10.275,12.725 10.275,12.025 10.275,11.75
  pour cut-out: 13.187,12.135 13.213,12.16 13.812,12.16 13.812,12.01 13.837,11.985 13.737,11.885 13.212,11.885
  pour cut-out: 6.15,3.043 6.15,1.375 3.472,1.375 3.472,3.043
  pour cut-out: 16.425,7.638 16.425,7.263 16.8,7.263 16.8,7.638
  pour cut-out: 16.425,7.1 16.425,6.725 16.8,6.725 16.8,7.1
  pour cut-out: 15.075,4.675 15.075,4.375 15.375,4.375 15.375,4.675
  pour cut-out: 1.975,9.675 1.975,9.35 2.275,9.35 2.275,9.675
  pour cut-out: 1.975,10.925 1.975,10.625 2.275,10.625 2.275,10.925
  pour cut-out: 7.975,11.025 7.975,10.725 8.225,10.725 8.225,11.025
  pour cut-out: 8.35,7.175 8.35,6.925 8.65,6.925 8.65,7.175
  pour cut-out: 16.775,5.05 16.775,4.75 17.075,4.75 17.075,5.05
  pour cut-out: 8.125,14.35 8.15,14.325 8.1,14.2 8.15,14.05 8.4,14.05 8.4,14.35
  pour cut-out: 7.075,17.675 7.075,17.375 8.075,17.375 8.075,17.675
  pour cut-out: 13.975,4.2 13.975,3.9 14.275,3.9 14.275,4.2
  pour cut-out: 16.4,8.087 16.4,7.813 16.7,7.813 16.7,8.087
  pour cut-out: 16.675,10.25 16.675,9.95 16.975,9.95 16.975,10.25
  pour cut-out: 16.975,11.175 16.675,11.175 16.675,11.475 16.975,11.475
  pour cut-out: 12.767,14.57 12.767,14.05 13.042,14.05 13.042,14.57
  pour cut-out: 13.325,13.87 13.325,12.1 13.65,12.1 13.65,13.87
  pour cut-out: 16.51,4.73 16.5,4.72 16.5,4.24 17.26,4.24 17.29,4.27 17.29,4.71 17.28,4.72 16.51,4.72
  pour cut-out: 14.47,5.65 14.49,5.63 14.49,4.86 14.51,4.88 15.65,4.88 15.66,4.89 15.66,5.66
  region net GPIO5: 8.025,4.062 8,4.55 8.45,4.237 8.05,4.062
  pour cut-out: 5.6,1.375 5.6,1.25 7.525,1.25 7.525,1.375
  region net UWB_ANT: 11.795,15.68 11.77,16 12.575,16.06 12.585,15.77 12.585,15.67
  region net GND: 11.47,15.66 11.47,16.54 11.41,17.65 10.2,17.65 10.18,17.63 10.18,15.65
  region net GND: 11.38,15.66 11.38,17.65 11.14,17.65 11.14,15.66
  region net DW_RF_N: 12.775,11.275 12.747,11.36 12.73,11.36 12.73,11.275
  region net DW_RF_P: 12.975,11.275 13.003,11.36 13.011,11.36 13.011,11.275
  pour cut-out: 11.425,14.775 11.8,14.775 11.8,14.575 11.425,14.575
  pour cut-out: 1.85,6.5 1.85,4.1 5.15,4.1 5.15,6.5
  pour cut-out: 5.75,6.7 5.75,4.35 7.6,4.35 7.6,6.7
  pour cut-out: 7.875,6.85 7.875,6.65 8.2,6.65 8.2,6.85
  pour cut-out: 8.475,4.575 8.475,4.15 9.3,4.15 9.45,4.3 9.45,4.55
  region net GND: 10.18,15.65 10.175,15.645 10.175,15.3 10.275,15.3 10.8,14.775 11.425,14.775 11.425,15.75 11.4,15.775 10.175,15.775
  pour cut-out: 6.45,16.725 6.45,15.825 6.525,15.9 10.175,15.9 10.175,16.75 10.15,16.725
  text "LAYER-01_TOP" at 64.3,-0.675 h1.27
L2:
  rectangle net GND: 12.756,17.558 18.5,22.6
  rectangle net GND: 2.675,0.45 5.025,1.225
  rectangle net GND: 14.225,16.262 16.3,17.65
  region net GND: 6.298,17.635 11.361,17.635 11.4,17.674 11.4,22.6 6.301,22.6
  pour cut-out: 18.5,17.5 18.825,17.5 18.825,17.7 18.525,17.7 18.5,17.725
  pour cut-out: 11.575,15.1 11.6,15.075 11.6,14.4 14.125,14.4 14.15,14.425 14.15,15.7 14.145,15.72 14.125,15.725 12.775,15.725 12.775,15.125 12.75,15.1
  pour cut-out: 11.5,15.1 12.875,15.1 12.75,17.675 11.375,17.675
  pour cut-out: 12.2,10.425 13.6,10.425 13.6,13.24 14.16,13.24 14.15,15.7 11.6,15.7 11.6,13.25 12.2,13.247
  pour cut-out: 12.063,15.1 11.575,15.1 11.575,15.7 11.952,15.7 11.975,15.678
  pour cut-out: -87.75,-93.05
  pour cut-out: 12.8,15.6 12.8,15.95 14.15,15.95 14.15,15.6
  region net GND: 3.2,1.475 3.5,1.175 3.5,1.075 3,1.075 3,1.475
  text "LAYER-02" at 65.675,-0.65 h1.27
L4:
  rectangle net GND: 6.3,17.6 18.5,22.6
  rectangle net GND: 2.95,0.45 5.05,1.775
  rectangle net GND: 14.25,16.45 16.45,17.65
  text "LAYER-04" at 64.6,-0.7 h1.27
L3:
  rectangle net GND: 17.95,17.175 18.5,17.75
  rectangle net GND: 12.768,17.558 18.5,22.6
  rectangle net GND: 6.3,17.65 11.388,22.6
  rectangle net GND: 14.175,16.15 16.575,17.65
  rectangle net GND: 2.8,0.45 5,1.675
  region net IRQ_DRDY: 2.325,16 2.7,16.375 2.7,16.4
  pour cut-out: 12.2,10.425 13.6,10.425 13.6,13.25 14.15,13.25 14.15,15.95 11.6,15.95 11.6,13.245 12.2,13.246
  pour cut-out: 11.513,15.087 12.888,15.087 12.763,17.662 11.388,17.662
  text "LAYER-03" at 65.575,-0.7 h1.27
L5:
  rectangle net GND: 17.75,17.4 18.5,17.65
  rectangle net GND: 6.3,17.65 18.5,22.6
  rectangle net GND: 2.925,0.475 4.975,1.8
  rectangle net GND: 14.25,16.4 16.325,17.65
  text "LAYER-05" at 65.625,-0.65 h1.27
L6:
  rectangle net GND: 2.85,0.45 5.025,1.525
  rectangle net GND: 14.262,16.575 16.3,17.65
  rectangle net GND: 14.425,16.354 16.075,16.725
  rectangle net GND: 3.317,0.652 4.826,1.95
  rectangle net GND: 6.325,17.45 18.5,22.6
  text "LAYER-06_BOTTOM" at 61.875,-0.8 h1.27

## Silkscreen, mask and mechanical layers (free items; w line width, h text height)
Top Overlay:
  rectangle: 1.75,6.75 1.925,16.325
  text "TOP_OVERLAY" at 63.6,-0.7 h1.27
Top Paste:
  text "SOLDERPASTE TOP" at 60.7,-0.75 h1.27
Bottom Paste:
  text "SOLDERPASTE BOTTOM" at 58.95,-0.7 h1.27
Top Solder:
  rectangle: 11.575,17.775 12.575,20.5
  region: 12.39,12.77 13.35,12.77 13.35,11.5 12.39,11.5
  region: 11.575,17.775 12.579,17.775 12.663,16.085 11.658,16.085
  text "TOP MASK" at 65.175,-0.725 h1.27
Bottom Solder:
  text "BOTTOM MASK" at 63.225,-0.725 h1.27
MFG_NOTES:
  drawing of 507 lines, arcs and shapes, not listed
  text "Board info" at 62.3,295.25 h1.52
  text "Minimum Track: 100um" at 62.3,292.75 h1.52
  text "Minimum Gap: 100um" at 62.3,290.25 h1.52
  text "Minimum Through Hole VIA: 0.45mm (pad) / 0.2mm (drill). Drilling: L1-L6" at 62.3,287.75 h1.52
  text "Minimum uVIA: 0.23mm (pad) / 0.1mm (drill). Drilling: L1-L2,L2-L3" at 62.3,284.75 h1.52
  text "1. REMOVE ALL NON-FUNCTIONAL INNER LAYER PADS." at 62.3,280.2 h1.52
  text "2. THIS BOARD CONTAINS NO  IMPEDANCE CONTROLLED TRACKS" at 62.3,275.2 h1.52
  text "3. FINISHED PANEL THICKNESS IS NOT CRITICAL: TO BE APPROXIMATELY 1.0mm" at 62.3,270.7 h1.52
  text "4. BOARD FINISH: ENIG" at 62.3,265.7 h1.52
  text "5. SOLDER RESIST: APPLY TO BOTH SIDES COLOUR - NAVY BLUE" at 62.3,260.7 h1.52
  text "6. COMPONENT IDENT: COLOUR TO BE WHITE" at 62.3,255.7 h1.52
  text "7. PANELIZE THE BOARD (5PCS x 4PCS  PER PANEL). PLACE FIDUCIALS ON THE PANEL STRIPS AS FOLLOWS:" at 62.3,250.7 h1.52
  text "- FIDUCIAL DIAMTER 1-1.5MM, SOLDER MASK OPENING AT LEAST 1MM GREATER THAN FIDUCIAL" at 67.3,248.2 h1.52
  text "- MINIMUM 4MM DISTANCE FROM THE PANEL EDGE" at 67.3,245.7 h1.52
  text "- 3 FIDUCIALS SHOULD LIE ON TWO LINES THAT INTERSECT AT A RIGHT ANGLE" at 67.3,243.2 h1.52
  text "- PLACE ONE FIDUCIAL INTO EACH PANEL CORNER (FOUR ON THE TOP AND FOUR ON THE BOTTOM LAYER)" at 67.3,240.7 h1.52
  text "PANEL DRAWING EXAMPLE (NOT IN SCALE):" at 66.554,235.454 h1.52
  text "- NOT SPECIFIED DIMENSIONS ARE NOT CRITICAL. CAN BE CHOSEN BY PCB MANUFACTURER" at 66.554,232.954 h1.52
  text "FIDUCIAL" at 161.254,217.554 h1.52
  text "CUT-OUT" at 129.95,214.95 h1.52
  text "2mm" at 89.45,205.85 h1.52
  text "PCB" at 98.8,172.2 h5.08
  text "PCB" at 128.8,172.2 h5.08
  text "PCB" at 159.8,172.2 h5.08
  text "PCB" at 98.8,132.2 h5.08
  text "PCB" at 128.8,132.2 h5.08
  text "PCB" at 159.8,132.2 h5.08
  text "V-CUT" at 236.404,131.354 h1.52
  text "27.07mm" at 73.05,94.45 h1.52 r90
  text "PCB" at 99.8,94.2 h5.08
  text "PCB" at 129.8,94.2 h5.08
  text "PCB" at 160.8,94.2 h5.08
  text "19.13mm" at 132.25,67.45 h1.52
  text "FIDUCIALS" at 131.654,44.354 h1.52
  text "Layer" at 63.347,21.721 h1.52
  text "Name" at 73.758,21.721 h1.52
  text "Material" at 97.374,21.721 h1.52
  text "Thickness" at 119.212,21.721 h1.52
  text "Constant" at 135.718,21.721 h1.52
  text "Board Layer Stack" at 150.192,21.721 h1.52
  text "1" at 63.347,18.673 h1.52
  text "Top Overlay" at 73.758,18.673 h1.52
  text "2" at 63.347,15.625 h1.52
  text "Top Solder" at 73.758,15.625 h1.52
  text "Solder Resist" at 97.374,15.625 h1.52
  text "0.013mm" at 119.212,15.625 h1.52
  text "3.5" at 135.718,15.625 h1.52
  text "3" at 63.347,12.577 h1.52
  text "L1" at 73.758,12.577 h1.52
  text "Copper" at 97.374,12.577 h1.52
  text "0.029mm" at 119.212,12.577 h1.52
  text "4" at 63.347,9.529 h1.52
  text "Dielectric1" at 73.758,9.529 h1.52
  text "0.065mm" at 119.212,9.529 h1.52
  text "3.8" at 135.718,9.529 h1.52
  text "5" at 63.347,6.481 h1.52
  text "L2" at 73.758,6.481 h1.52
  text "Copper" at 97.374,6.481 h1.52
  text "0.029mm" at 119.212,6.481 h1.52
  text "6" at 63.347,3.433 h1.52
  text "Dielectric 4" at 73.758,3.433 h1.52
  text "0.065mm" at 119.212,3.433 h1.52
  text "3.8" at 135.718,3.433 h1.52
  text "7" at 63.347,0.385 h1.52
  text "L3" at 73.758,0.385 h1.52
  text "Copper" at 97.374,0.385 h1.52
  text "0.018mm" at 119.212,0.385 h1.52
  text "8" at 63.347,-2.663 h1.52
  text "Dielectric2" at 73.758,-2.663 h1.52
  text "IS400" at 97.374,-2.663 h1.52
  text "0.510mm" at 119.212,-2.663 h1.52
  text "4.2" at 135.718,-2.663 h1.52
  text "9" at 63.347,-5.711 h1.52
  text "L4" at 73.758,-5.711 h1.52
  text "Copper" at 97.374,-5.711 h1.52
  text "0.018mm" at 119.212,-5.711 h1.52
  text "10" at 63.347,-8.759 h1.52
  text "Dielectric 5" at 73.758,-8.759 h1.52
  text "0.065mm" at 119.212,-8.759 h1.52
  text "3.8" at 135.718,-8.759 h1.52
  text "11" at 63.347,-11.807 h1.52
  text "L5" at 73.758,-11.807 h1.52
  text "Copper" at 97.374,-11.807 h1.52
  text "0.029mm" at 119.212,-11.807 h1.52
  text "12" at 63.347,-14.855 h1.52
  text "Dielectric3" at 73.758,-14.855 h1.52
  text "0.065mm" at 119.212,-14.855 h1.52
  text "3.8" at 135.718,-14.855 h1.52
  text "13" at 63.347,-17.903 h1.52
  text "L6" at 73.758,-17.903 h1.52
  text "Copper" at 97.374,-17.903 h1.52
  text "0.029mm" at 119.212,-17.903 h1.52
  text "14" at 63.347,-20.951 h1.52
  text "Bottom Solder" at 73.758,-20.951 h1.52
  text "Solder Resist" at 97.374,-20.951 h1.52
  text "0.013mm" at 119.212,-20.951 h1.52
  text "3.5" at 135.718,-20.951 h1.52
  text "15" at 63.347,-23.999 h1.52
  text "Bottom Overlay" at 73.758,-23.999 h1.52
Mechanical 10:
  lines w0.1: 0,0 0,26.125 19.125,26.125 19.125,0 0,0
M16_COMPONENT OUTLINE:
  lines w0.01: 11.42,17.65 11.68,17.65 ; 11.47,16.53 11.74,16.53 ; 12.811,12.123 12.938,12.123 ; 12.814,13.861 12.941,13.861
  lines w0.05: 14.9,1.775 15.125,2 ; 15.125,1 15.125,2 ; 15.35,1.775 15.125,2 ; 4.625,1.375 4.625,1.375
  lines w0.1: 0,6.15 0,7.15
  lines w0.15: 1.4,0.9 3.9,0.9 ; 15.2,17.2 17.7,17.2
  text "TOP ASSEMBLY" at 63.175,-0.65 h1.27
M17_OUTLINE:
  lines w0.05: 7.25,1.35 7.475,1.125
  lines w0.1: 0,0 0,23 19.125,23 19.125,0 0,0
M29_TOP DESIG:
  text "TOP DESIGNATOR" at 64.95,1.425 h1.27
M30_TOP VALUE:
  lines w0.05: 4.35,1.1 4.625,1.375 ; 4.375,0.75 4.625,1 4.625,1.375 ; 4.875,1.125 4.625,1.375 ; 7.025,1.125 7.25,1.35 7.25,1.125 7.5,0.875 ; 8.425,15 8.425,14.9 9.125,14.2 ; 8.775,14.2 9.125,14.2 ; 9.125,14.55 9.125,14.2
  text "TOP COMMENT" at 66.025,1.4 h1.27
Board outline:
  lines w0.1: 0,0 0,26.125 19.125,26.125 19.125,0 0,0

## Text inside footprints (layer, text, board x,y; h text height)
U1: M30_TOP VALUE "DW1000" at 9.9,7.8 h0.8
X1: M30_TOP VALUE "2CAS" at 8.35,11.45 h0.6 r90
X2: M30_TOP VALUE "2CAT" at 14.725,2.875 h0.6
X3: M30_TOP VALUE "KCBB" at 3.625,9.45 h0.8 r90